# Altium PCB transmitter_PCB.PcbDoc
Units mil, origin at the board's own origin, x right, y up, seen from the top; angles counter-clockwise.
Board outline 6000 x 4000 mil, 2 copper layers (Top Layer, Bottom Layer); 7 components, 6 nets, 16 pads, 0 vias.
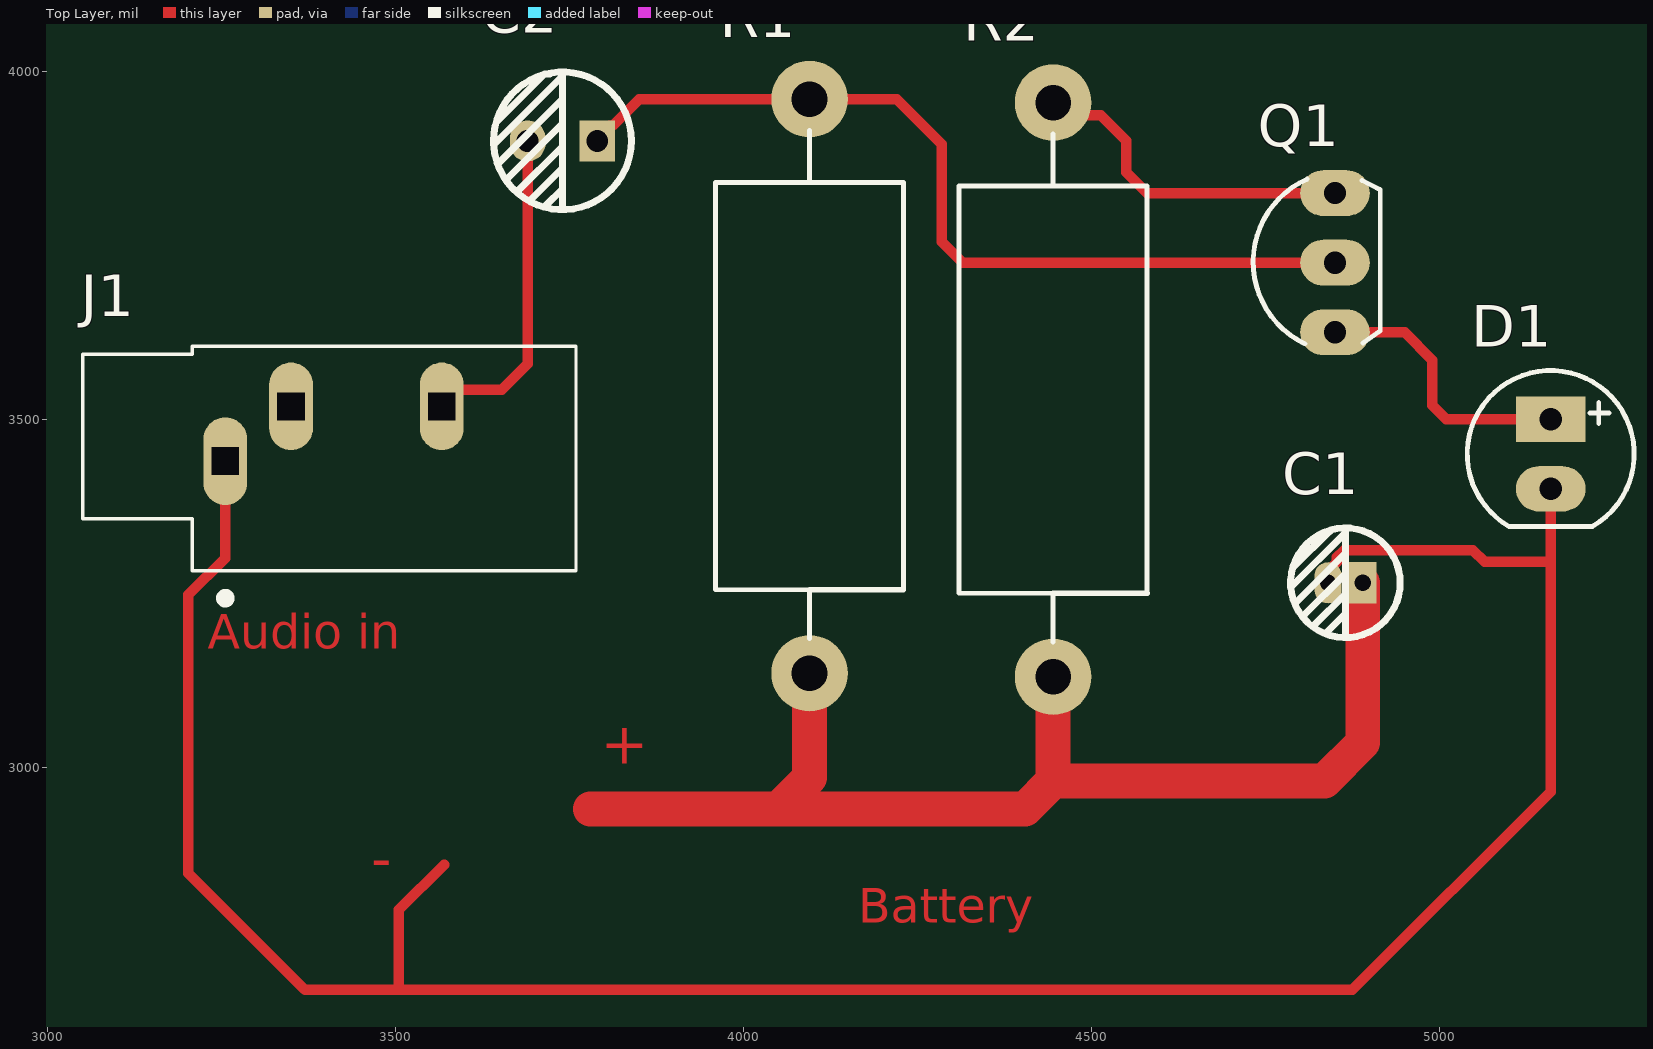
[diagram p0: Top Layer view]
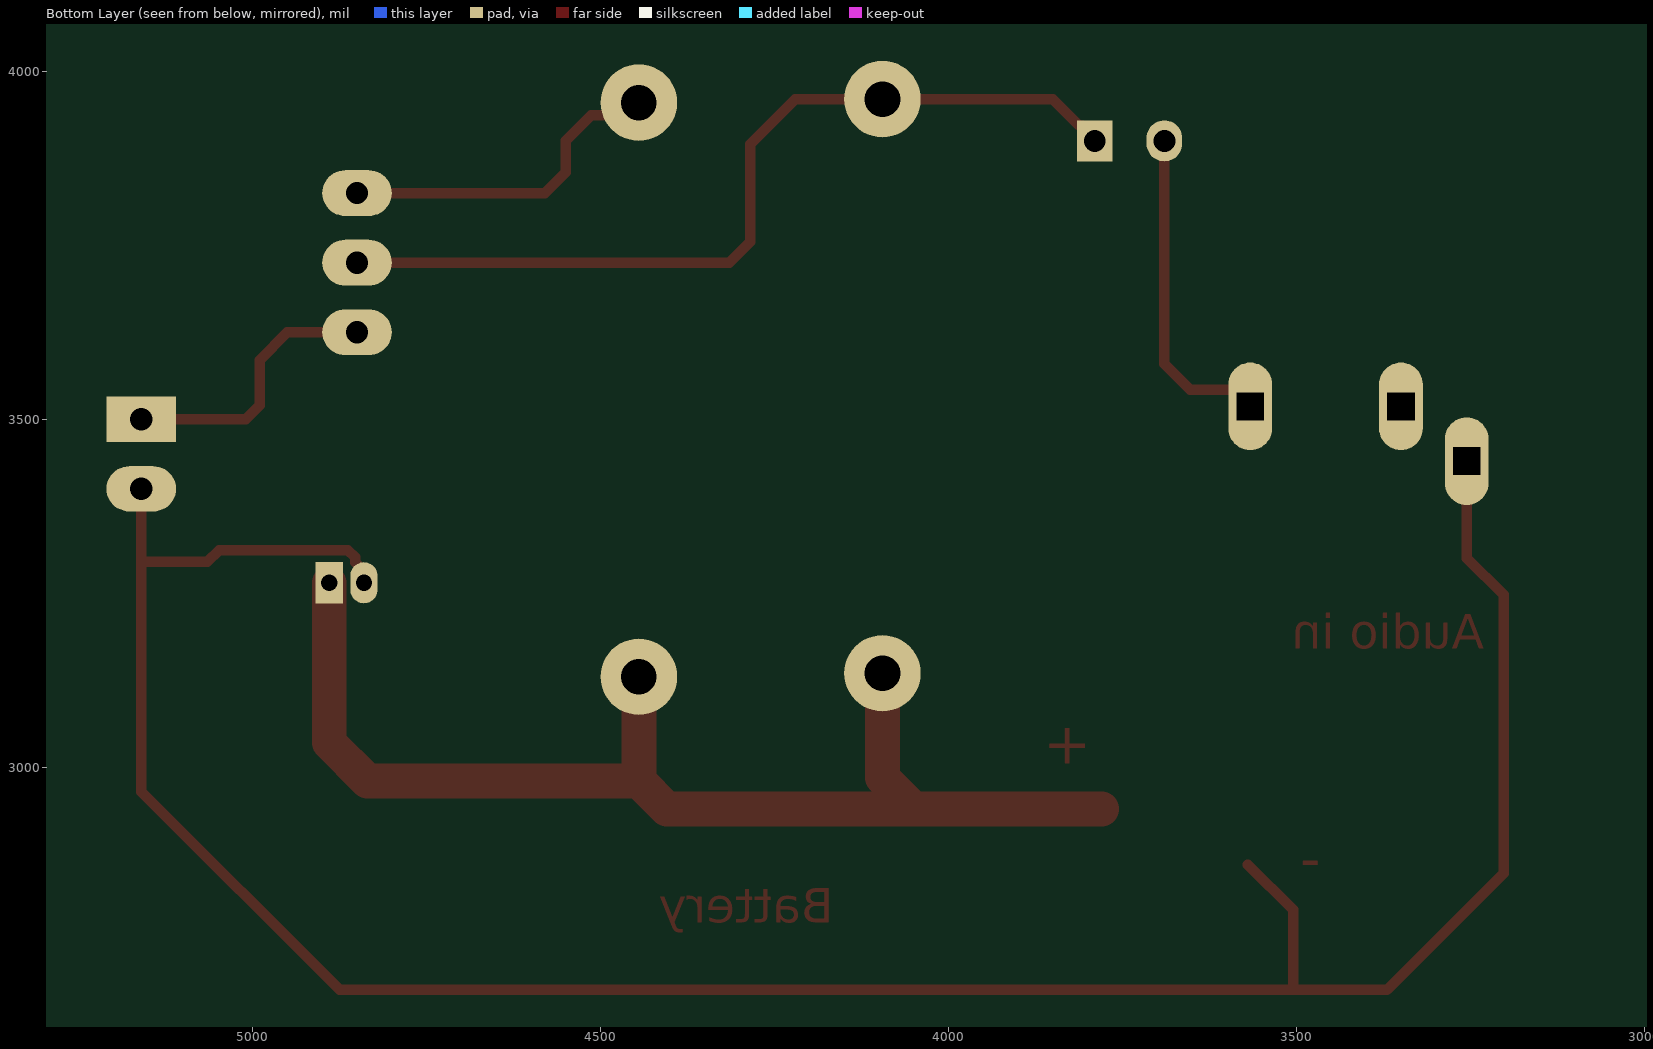
[diagram p1: Bottom Layer view, seen from below]
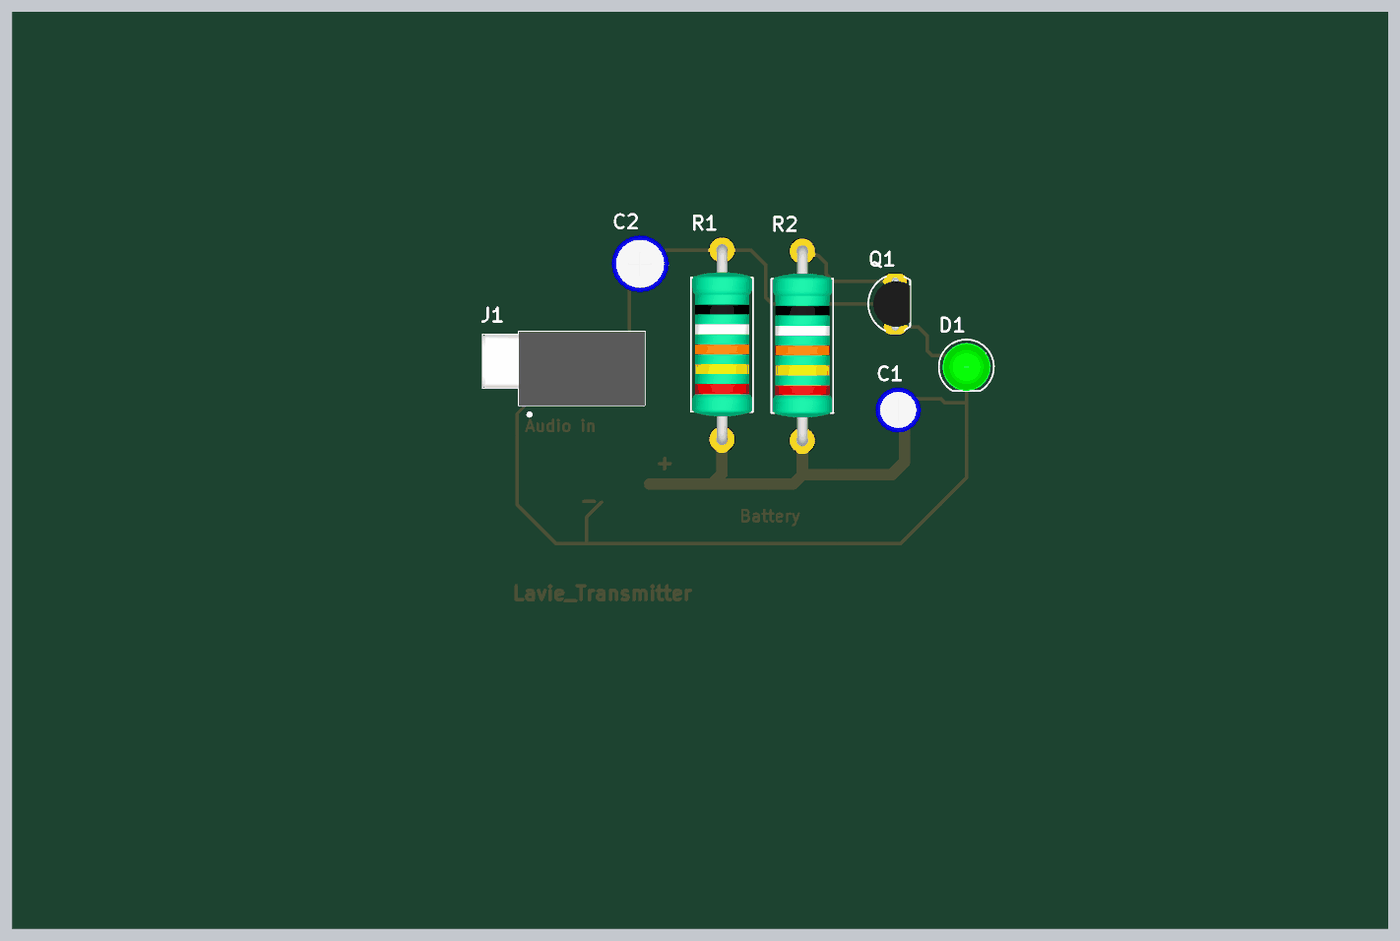
[diagram p2: 3D render of the assembled board from above, using the file's embedded part models]

## Layer stack, top to bottom
Top Solder: solder mask 0.4, Solder Resist, Dk 3.5
Top Layer: signal copper 1.4
Dielectric 1: dielectric 12.6, FR-4, Dk 4.8
Bottom Layer: signal copper 1.4
Bottom Solder: solder mask 0.4, Solder Resist, Dk 3.5

## Board outline
1000,1000 7000,1000 7000,5000 1000,5000

## Design rules (kind name [scope] priority, off if disabled: settings)
Clearance [All] p1: gap=10 ignorepadtopadclearanceinfootprint=FALSE except(0: Arc-Hole Track-Hole SMDPad-Hole THPad-Hole Via-Hole Fill-Hole Poly-Hole Region-Hole Text-Hole)
PolygonConnect [All] p1: connectstyle=Relief reliefconductorwidth=10 reliefentries=4 polygonreliefangle="90 Angle" airgapwidth=10
RoomDefinition transmitter_SCH [InComponentClass('transmitter_SCH')] p1: confinementstyle=ConfineIn formatcopy=TRUE lockcomponents=FALSE outline 3025,2340 5410,2340 5410,4155 3025,4155
RoutingVias [All] p1: holewidth=28 width=50 viastyle="Through Hole" minholewidth=28 minwidth=50 maxholewidth=28 maxwidth=50
SolderMaskExpansion [All] p1: expansion=4 istentingtop=FALSE
Width [All] p1: maxlimit=50 minlimit=15 preferedwidth=25 minimp=50.000000 maximp=50.000000 favimp=50.000000
30 further rules are at their usual default settings.

## Classes and differential pairs
component class transmitter_SCH: C1 C2 J1 Q1 R2

## Components (designator, comment, footprint, x,y, rotation, side; value= is the part's Value field where it differs from the comment)
C1 "10uF" "tu hoa 4mm" 4865,3265 r180 top
C2 "4.7uF" "tu hoa 5mm" 3740,3900 r180 top
D1 "Photo Diode" "LED-5 GRe" 5160,3500 r270 top
J1 "jack audio" CUI_SJ1-3533N 3255.51,3439.72 r0 top
Q1 "S8050" TO92-123 4850,3725 r90 top value=C1815
R1 "300K" RES-2W 4100,3540 r90 top
R2 "100" RES-2W 4450,3535 r90 top

## Footprints (in the part's own frame and the unit in brackets; to place one, negate y for a bottom-side part, rotate by r counter-clockwise, add the part's x,y. Pads: shape width x height; smd on the part's side, far side on the other; paste and mask are expansions set on the pad)
CUI_SJ1-3533N [mm]
  oval 1.6x3.2 hole 1 square: 1(0,0) 2(2.4,2) 3(7.9,2)
  silkscreen extent -5.2,-5.17 12.8,4.2, body extent -5.19,-4.01 12.81,4.19, height 14.19
"LED-5 GRe" [mil] "LED 2 PIN, 5 ly , Only colour,pin to pin 100mil"
  rect 65x100 hole 32: 1(0,0)
  oval 65x100 hole 32: 2(100,0)
  silkscreen extent -70,-120 154,120, body extent -54,-104 154,105, height 337
RES-2W [mil] "R2W, 2 pin, 700mil"
  round 110 hole 51.18: 1(-405,5) 2(420,5)
  silkscreen extent -355,-130 375,140, body extent -428,-126 446,134, height 277
TO92-123 [mil] "TO-92"
  oval 66x100 hole 32: 1(-100,0) 2(0,0) 3(100,0)
  silkscreen extent -117,-65 120,118, body extent -109,-66 109,95, height 245
"tu hoa 4mm" [mm]
  rect 1x1.5 hole 0.6: 1(-0.635,0)
  oval 1x1.5 hole 0.6: 2(0.635,0)
  silkscreen extent -2,-2 2.01,2.01, body extent -2.47,-2.47 2.58,2.58, height 14.81
"tu hoa 5mm" [mm]
  rect 1.3x1.5 hole 0.8: 1(-1.27,0)
  oval 1.3x1.5 hole 0.8: 2(1.27,0)
  silkscreen extent -2.51,-2.51 2.51,2.51, body extent -3.12,-3.18 3.23,3.18, height 14.55

## Part data
C1: library part "Tu Hoa 10uF 16V 4x7", "Cắm", Chung_Loai=Cắm, Don_Vi=Con, Ma_Hang=MH006855, So_Chan=2, Ten_Linh_Kien="Tụ Hóa 10uF 16V"
C2: library part "Tu Hoa 4.7uF 50V 5x11", "Cắm", Chung_Loai=Cắm, Don_Vi=Con, Ma_Hang=MH001357, So_Chan=2, Ten_Linh_Kien="Tụ Hóa 4.7uF 50V 5x11MM"
D1: "Photosensitive Diode"
Q1: library part 2N904, "NPN 600mW, ECB"
R1 R2: library part Res, "Res", Manufacturer="Generic Components", Class=Passive, Published=08/06/2000, Publisher="Altium Hobart Technology Centre", SubClass=R

## Nets (pads, with @x,y where several pads share a name; then routed paths per layer and width w, separated by ;. In a path a pad name is that pad's centre, name@x,y a point inside that pad or via, vN(x,y) a via of type N, cw(c..) or ccw(c..) an arc to the next point about the centre after c; other vN are vias at no path point)
GND: C1.2 D1.2 J1.1 | length 3761.6
  Top Layer w15: J1.1 3255.51,3300.5 3202.5,3247.49 3202.5,2847.5 3370,2680 3505,2680 ; 3570,2860 3505,2795 3505,2680 ; C1.2 4840,3281.44 4852.81,3294.25 4852.81,3301.78 4863.07,3312.03 5047.97,3312.03 5065,3295 5160,3295 ; D1.2 5160,3295 ; 3505,2680 4875,2680 5160,2965 5160,3295
NetC2_1: C2.1 Q1.2 R1.2 | length 1266.5
  Top Layer w15: C2.1 3790,3903.94 3808.09,3922.03 3812.03,3922.03 3850,3960 R1.2 4220,3960 4285,3895 4285,3755 4315,3725 Q1.2
NetC2_2: C2.2 J1.3 | length 470
  Top Layer w15: J1.3 3566.54,3520.29 3588.7,3542.46 3652.46,3542.46 3690,3580 C2.2
NetD1_1: D1.1 Q1.1 | length 399.9
  Top Layer w15: Q1.1 4950,3625 4990,3585 4990,3520 5010,3500 D1.1
NetQ1_3: Q1.3 R2.2 | length 485.2
  Top Layer w15: R2.2 4463.18,3936.82 4513.18,3936.82 4550,3900 4550,3855 4580,3825 Q1.3
VCC: C1.1 R1.1 R2.1 | length 1743
  Top Layer w50: 3780,2940 4050,2940 ; R1.1 4095,2985 4050,2940 ; R2.1 4445,2980 ; C1.1 4890,3035 4835,2980 4445,2980 ; 4050,2940 4405,2940 4445,2980
pads on no net: J1.2

## Other copper
Top Layer:
  text "Audio in" at 3230,3170 h50
  text "+" at 3795,3005 h60
  text "-" at 3465,2840.01 h60
  text "Battery" at 4165,2776.66 h50
  text "Lavie_Transmitter" at 3170,2435 h60